# Altium PCB OpenBCI Hyperscanning.PcbDoc
Units mil, origin at the board's own origin, x right, y up, seen from the top; angles counter-clockwise.
Board outline 1645 x 1125 mil, 2 copper layers (Top Layer, Bottom Layer); 35 components, 37 nets, 123 pads, 367 vias.
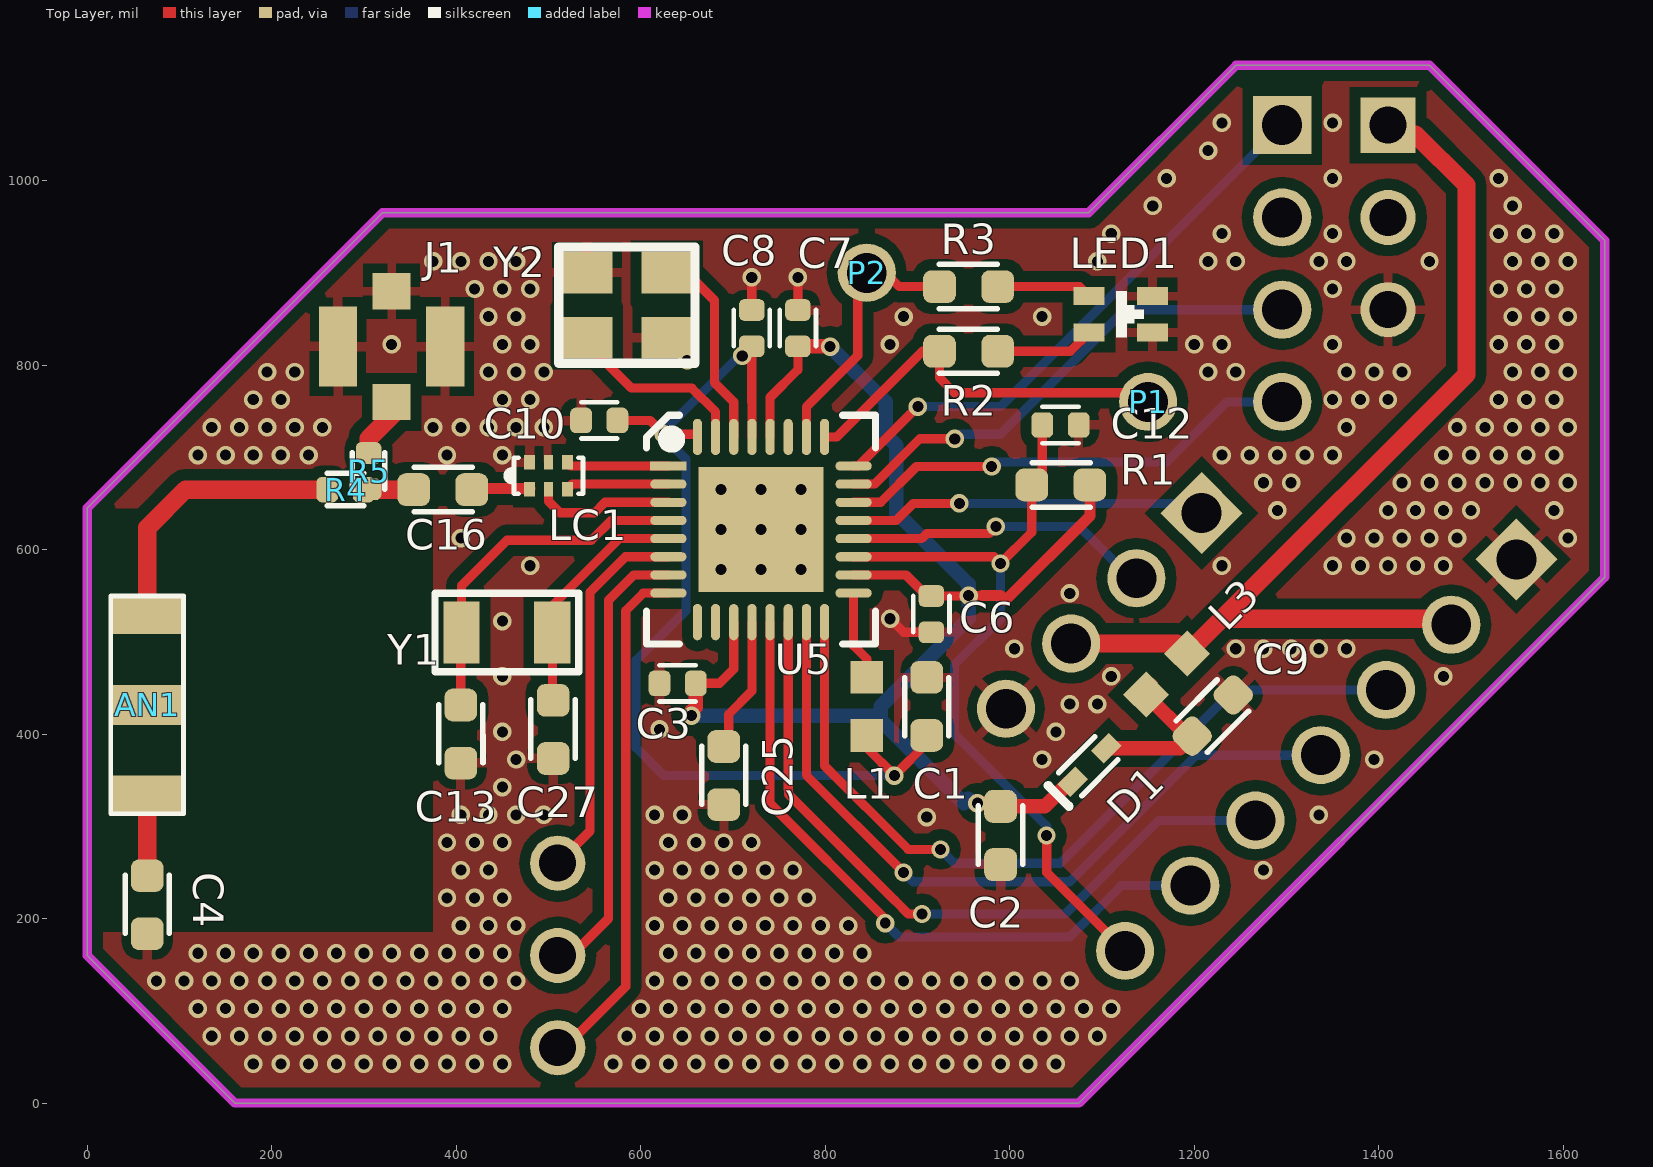
[diagram p0: Top Layer view]
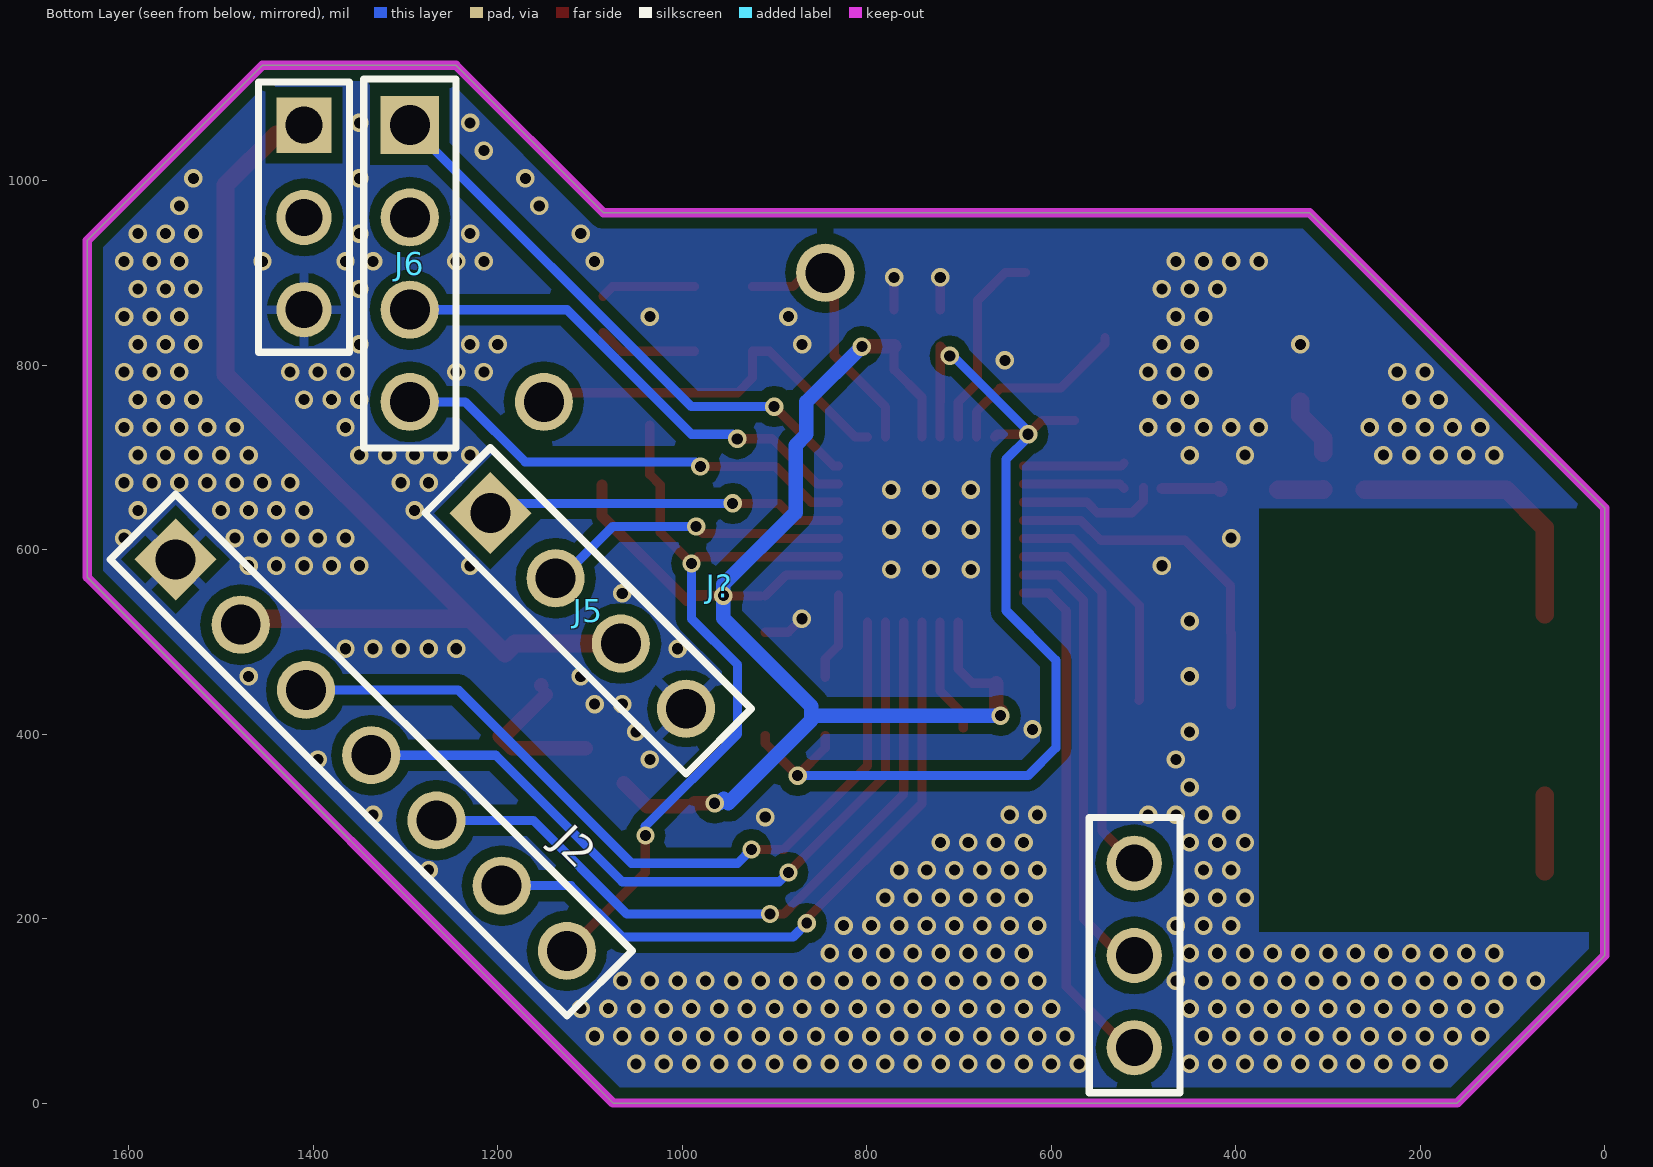
[diagram p1: Bottom Layer view, seen from below]
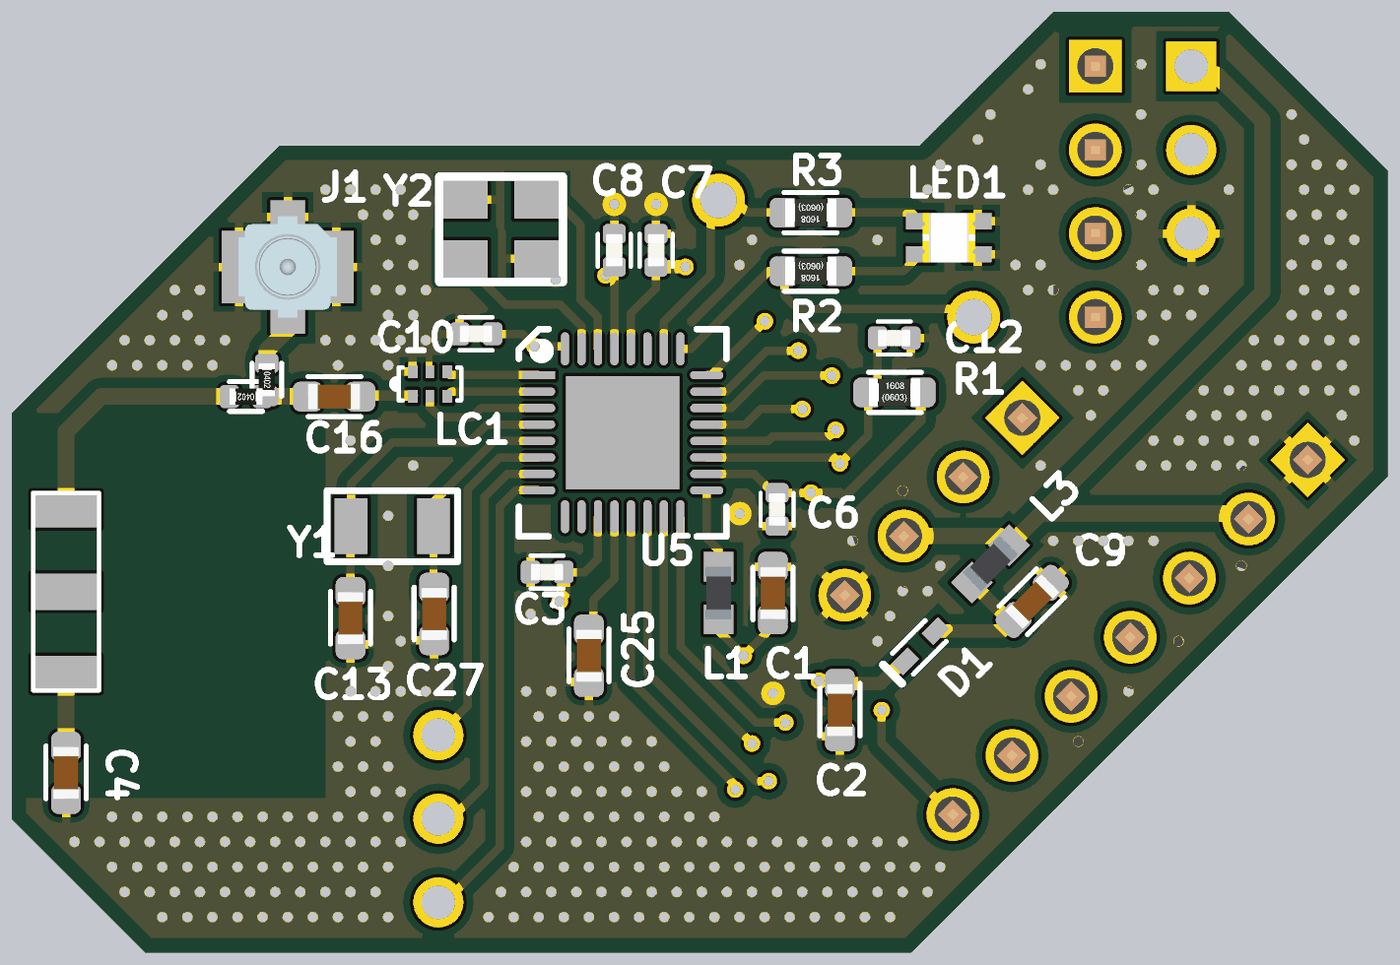
[diagram p2: 3D render of the assembled board from above, using the file's embedded part models]
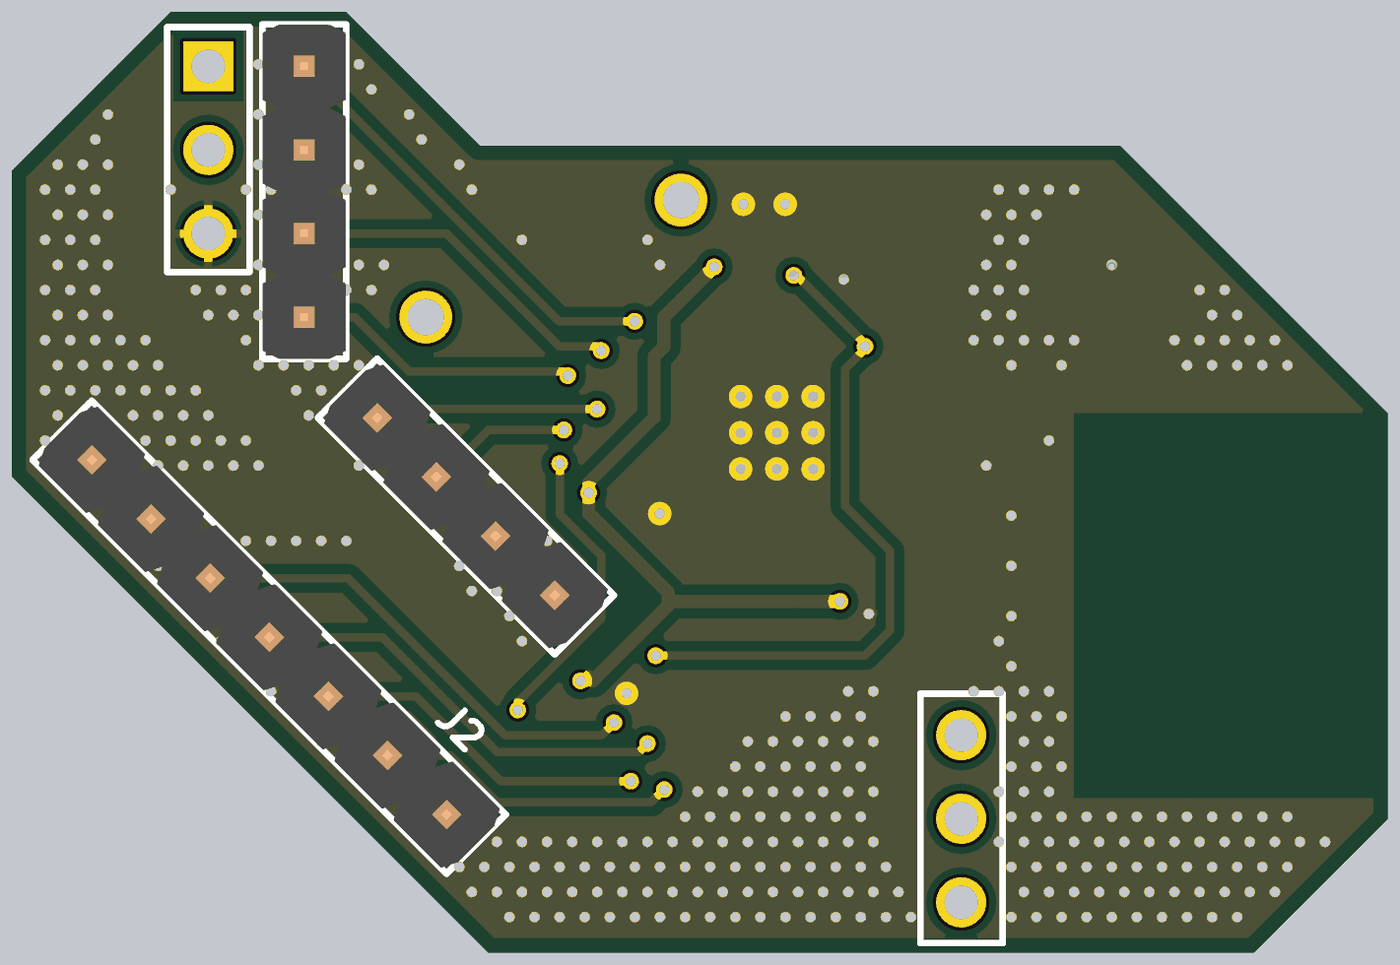
[diagram p3: 3D render of the assembled board from below, using the file's embedded part models]

## Layer stack, top to bottom
Top Solder: solder mask 0.4, Solder Resist, Dk 3.5
Top Layer: signal copper 1.4
Dielectric 1: dielectric 12.6, FR-4, Dk 4.8
Bottom Layer: signal copper 1.4
Bottom Solder: solder mask 0.4, Solder Resist, Dk 3.5

## Board outline
0,160 0,645 320,965 1085.35,965 1245.35,1125 1455,1125 1645,935 1645,570 1075.01,0 160,0

## Design rules (kind name [scope] priority, off if disabled: settings)
Clearance "Stitching GND" [IsStitchingVia and InNet('GND') vs (IsVia and (Not IsStitchingVia)) Or IsPad] p1: gap=5 ignorepadtopadclearanceinfootprint=FALSE
Clearance [All] p2: gap=12 ignorepadtopadclearanceinfootprint=FALSE except(5: Arc-Text Track-Text SMDPad-Text THPad-Text Via-Text Fill-Text Poly-Text Region-Text Text-Text; 7.87: Arc-Arc Arc-Track Track-Track; 8: Arc-SMDPad Track-SMDPad SMDPad-SMDPad SMDPad-THPad SMDPad-Via SMDPad-Hole; 10: Arc-THPad Arc-Via Arc-Hole Track-THPad Track-Via Track-Hole THPad-THPad THPad-Via THPad-Hole Via-Via Via-Hole Fill-Hole Poly-Hole Region-Hole Text-Hole)
ComponentClearance [All] p1: gap=0 collisioncheckmode=3 verticalgap=0 showdistances=FALSE
HoleSize [All] p1: absolutevalues=TRUE maxlimit=100 minlimit=11.81 maxpercent=80.000 minpercent=20.000
MinimumSolderMaskSliver [All] p1: minsoldermaskwidth=8
PolygonConnect [All] p1: thpad.connectstyle=Relief thpad.reliefconductorwidth=10 thpad.reliefentries=4 thpad.polygonreliefangle="90 Angle" thpad.airgapwidth=10 smdpad.connectstyle=Relief smdpad.reliefconductorwidth=10 smdpad.reliefentries=4 smdpad.polygonreliefangle="90 Angle" smdpad.airgapwidth=10 via.connectstyle=Direct via.reliefconductorwidth=10 via.reliefentries=4 via.polygonreliefangle="90 Angle" via.airgapwidth=10
RoutingVias [All] p1: holewidth=11.81 width=19.68 viastyle="Through Hole" minholewidth=11.81 minwidth=19.68 maxholewidth=28 maxwidth=50
SilkToSolderMaskClearance [IsPad] p1: minsilkscreentomaskgap=6 clearancetoexposedcopper=TRUE
SolderMaskExpansion [All] p1: expansion=4 istentingtop=FALSE
Width [All] p1: maxlimit=30 minlimit=8 preferedwidth=12 minimp=50.000000 maximp=50.000000 favimp=50.000000
26 further rules are at their usual default settings.

## Components (designator, comment, footprint, x,y, rotation, side; value= is the part's Value field where it differs from the comment)
AN1 "Antenna Chip" Antena_ethertronics_M620720 65,431.57 r270 top value=Sub-1GHz
C1 "22uF" "C0603 - rounded" 910,430 r90 top
C2 "10uF" "C0603 - rounded" 990,290 r270 top
C3 "100nF" "C0402 - rounded" 640,455 r180 top
C4 "NP" "C0603 - rounded" 65,215 r270 top
C6 "100nF" "C0402 - rounded" 915,530 r270 top
C7 "100nF" "C0402 - rounded" 770.35,840 r90 top
C8 "100nF" "C0402 - rounded" 720.35,840 r90 top
C9 "10uF" "C0603 - rounded" 1220,420 r45 top
C10 "100nF" "C0402 - rounded" 555,740 r180 top
C12 "100nF" "C0402 - rounded" 1055,735 r0 top
C13 "12pF" "C0603 - rounded" 405,400 r270 top
C16 "100pF" "C0603 - rounded" 385.35,665 r180 top
C25 "1uF" "C0603 - rounded" 690,355 r270 top
C27 "12pF" "C0603 - rounded" 505,405 r270 top
D1 "Schottky Diode" SOD523 1085,365 r45 top
J1 "U.FL PCB SMT" "U.FL MALE SMT" 330,820.04 r0 top value=NP
J2 "07p" 61300711121 1337.13,377.13 r225 bottom
J5 "04p" 61300411121 1101.96,533.51 r225 bottom
J6 "04p" 61300411121 1295.35,910 r270 bottom
J? "Sub1Ghz-ESP-Conn" SUB1GHZ-ESP-CONN 1410,1060 r270 bottom
L1 "Inductor 0603" L0603 845,430 r270 top value=680uH
L3 "Ferrite bead 0603" L0603 1170,465 r225 top value="Bead 600Ohms"
LC1 "Balun" Balun_0603 500,680 r0 top value=Diversos
LED1 "APTB1615SURKCGKC" APTB1615SURKCGKC 1120.35,855 r270 top
P1 "Single Pin Conn" SinglePin 1150,760 r0 top
P2 "Single Pin Conn" SinglePin 845,900 r0 top
R1 "100K" "R0603 - rounded" 1055.35,670 r0 top value=100k
R2 "200R" "R0603 - rounded" 955.35,815 r180 top
R3 "200R" "R0603 - rounded" 955.35,885 r180 top
R4 "NP" "R0402 - rounded" 280,665 r180 top
R5 "NP" "R0402 - rounded" 305,685 r270 top
U5 "CC1310F128RHB" VQFN32-5x5 730.35,621.69 r0 top
Y1 "XTAL_FC135" "XTAL FC-135" 455,510 r270 top value=32.768kHz
Y2 "XTAL_TSX3225" "XTAL TSX-3225" 585,865 r90 top value=24MHz

## Footprints (in the part's own frame and the unit in brackets; to place one, negate y for a bottom-side part, rotate by r counter-clockwise, add the part's x,y. Pads: shape width x height; smd on the part's side, far side on the other; paste and mask are expansions set on the pad)
61300411121 [mm] "4 pins, 1 row, straight, gold plating"
  rect 1.6x1.6 hole 1.1: 1(-3.81,0)
  round 1.6 hole 1.1: 2(-1.27,0) 3(1.27,0) 4(3.81,0)
  silkscreen extent -5.08,-1.27 5.08,1.27, body extent -5.08,-1.27 5.08,1.27, height 8.57
61300711121 [mm] "7 pins, 1 row, straight, gold plating"
  rect 1.6x1.6 hole 1.1: 1(-7.62,0)
  round 1.6 hole 1.1: 2(-5.08,0) 3(-2.54,0) 4(0,0) 5(2.54,0) 6(5.08,0) 7(7.62,0)
  silkscreen extent -8.89,-1.27 8.89,1.27, body extent -8.89,-1.27 8.89,1.27, height 8.57
Antena_ethertronics_M620720 [mm] "Antena chip Ethertronics Sub-1GHz"
  rect 1.1x2.1 smd: 1(-2.5,0) 2(0,0) 3(2.5,0)
  silkscreen extent -3,-1 3,1, body extent -2.99,-1 3,1, height 1.08
APTB1615SURKCGKC [mm]
  rect 0.5x0.85 smd: A1(-0.5,-0.875) A2(0.5,-0.875) C1(-0.5,0.875) C2(0.5,0.875)
  silkscreen extent -0.64,-0.13 0.63,0.64, body extent -0.75,-0.8 0.75,0.8, height 0.58
Balun_0603 [mm] "SMD Balun 0603"
  rect 0.3x0.4 smd: 1(-0.525,-0.375) 3(0.525,-0.375) 4(0.525,0.375) 6(-0.525,0.375)
  rect 0.25x0.4 smd: 2(0,-0.375) 5(0,0.375)
  silkscreen extent -1.18,-0.5 0.95,0.5, body extent -0.8,-0.4 0.8,0.4, height 0.6
"C0402 - rounded" [mm]
  rrect50% 0.6x0.7 smd: 1(-0.5,0) 2(0.5,0)
  silkscreen extent -0.5,-0.5 0.5,0.5, body extent -0.5,-0.26 0.5,0.27, height 0.36
"C0603 - rounded" [mm] "Chip Capacitor, Body 3.2x1.6mm, IPC High Density"
  rrect50% 0.9x0.9 smd: 1(-0.8,0) 2(0.8,0)
  Top Layer pour cut-out: -0.3,0.457 -0.3,-0.419 0.3,-0.419 0.3,0.457
  silkscreen extent -0.81,-0.61 0.79,0.61, body extent -0.8,-0.4 0.8,0.4, height 0.8
L0603 [mm]
  rect 0.9x0.9 smd: 1(-0.8,0) 2(0.8,0)
  Top Layer pour cut-out: -0.3,0.5 0.3,0.5 0.3,-0.5 -0.3,-0.5
  body extent -0.8,-0.4 0.8,0.4, height 0.8
"R0402 - rounded" [mm]
  rrect50% 0.6x0.7 smd: 1(-0.5,0) 2(0.5,0)
  silkscreen extent -0.5,-0.45 0.5,0.45, body extent -0.5,-0.25 0.5,0.25, height 0.35
"R0603 - rounded" [mm]
  rrect50% 0.9x0.9 smd: 1(-0.8,0) 2(0.8,0)
  Top Layer pour cut-out: -0.3,0.5 0.3,0.5 0.3,-0.5 -0.3,-0.5
  silkscreen extent -0.79,-0.61 0.81,0.61, body extent -0.77,-0.42 0.78,0.43, height 0.45
SinglePin [mm]
  round 1.6 hole 1.1: 1(0,0)
SOD523 [mil]
  rect 27.56x19.69 smd: A(27.56,0) C(-23.62,0)
  silkscreen extent -45,-18 28,18
SUB1GHZ-ESP-CONN [mm]
  rect 1.52x1.52 hole 1.02: 1(0,0)
  round 1.52 hole 1.02: 2(2.54,0) 3(5.08,0) 4(20.32,22.86) 5(22.86,22.86) 6(25.4,22.86)
  silkscreen extent -1.19,-1.25 26.64,24.12
"U.FL MALE SMT" [mm]
  rect 1.05x1 smd: 1(0,-1.525) 2(0,1.525)
  rect 1.05x2.2 smd: 2(-1.475,0) 2(1.475,0)
  body extent -1.5,-1.54 1.5,1.54, height 1.23
VQFN32-5x5 [mm] "QFN, 32-Leads, Body 5x5mm, Pitch 0.5mm, Thermal Pad 3.45x3.45mm, IPC Medium Density"
  rect 1x0.25 smd: 1(-2.55,1.75)
  oval 1x0.25 smd: 2(-2.55,1.25) 3(-2.55,0.75) 4(-2.55,0.25) 5(-2.55,-0.25) 6(-2.55,-0.75) 7(-2.55,-1.25) 8(-2.55,-1.75) 17(2.55,-1.75) 18(2.55,-1.25) 19(2.55,-0.75) 20(2.55,-0.25) 21(2.55,0.25) 22(2.55,0.75) 23(2.55,1.25) 24(2.55,1.75)
  oval 0.25x1 smd: 9(-1.75,-2.55) 10(-1.25,-2.55) 11(-0.75,-2.55) 12(-0.25,-2.55) 13(0.25,-2.55) 14(0.75,-2.55) 15(1.25,-2.55) 16(1.75,-2.55) 25(1.75,2.55) 26(1.25,2.55) 27(0.75,2.55) 28(0.25,2.55) 29(-0.25,2.55) 30(-0.75,2.55) 31(-1.25,2.55) 32(-1.75,2.55)
  rect 3.45x3.45 smd: 33(0,0)
  silkscreen extent -3.15,-3.15 3.15,3.15, body extent -2.79,-2.79 2.79,2.79, height 1
"XTAL FC-135" [mm]
  rect 1.7x1 smd: 1(0,-1.25) 2(0,1.25)
  silkscreen extent -1.08,-1.98 1.08,1.98
"XTAL TSX-3225" [mm]
  rect 1.15x1.4 smd: 1(-0.9,1.1) 2(0.9,-1.1) 3(-0.9,-1.1) 3(0.9,1.1)
  silkscreen extent -1.6,-1.87 1.6,1.88

## Part data
AN1: library part Antena_chip_Sub-1GHz_Kyocera, "Antennas Ceramic Chip ANTENNA ISM Freq: 868 915MHz", Part Number=M620720, Família=Antena, Vendor=AVX
C1 C2 C3 C4 C6 C7 C8 C9 C10 C12 C13 C16 C25 C27: library part C-EU-SMD, "Generic Capacitor SMD"
D1: library part SCHOTTKY-DIODEDO201T15, Part Number=PMEG2010AEB,115, Familia=Diodos, Vendor=Nexperia
J1: "RF Connectors / Coaxial Connectors MHF1 Connector Receptacle, Male Pin 50 Ohm Surface Mount Solder", Família=Antena, Vendor="TE Connectivity"
J2: library part 61300711121, "WR-PHD 2.54 mm THT Pin Header, 07p", Part Number=61300711121, Vendor="Wurth Elektronik"
J5 J6: library part 61300411121, "WR-PHD 2.54 mm THT Pin Header, 04p", Part Number=61300411121, Vendor="Wurth Elektronik"
L1: library part L-US0603
L3: library part L-US0603, "Ferrite Beads 0603 600ohms", Part Number=MPZ1608S601ATA00, Familia=Indutores, Vendor=Murata
LC1: library part Balun_CC1310, "Sub-GHz Impedance Matched Balun + LPF integrated Passive Component for Texas Instruments CC1310 Chipset", Part Number="0850BM14E0016 or LFB18868MBG9E212", Familia=Diversos, Vendor="Johanson / Murata"
R1 R4 R5: library part R-US-SMD, "Generic Resistor SMD"
R2 R3: library part R-US_R0603, "Resistor SMD 0603"
U5: library part CC1310F32RHB, "Sub-1 GHz and 2.4 GHz Multi-standard RF IC Family, RSM", Familia=CI's, Part Number=CC1310F128RHB, Vendor="TEXAS INSTRUMENTS"
Y1: "CRYSTAL, RESONATOR, 32.768kHz, -20PPM/+20PPM, -40DEGC/+85DEGC, SMD", Part Number="FC-135 32.7680KA-AG0", Familia=Diversos, Vendor=Epson
Y2: "CRYSTAL, CRYSTAL OSCILLATOR, 24MHz, -15PPM/DEGC/+15PPM/DEGC, -40DEGC/+85DEGC, SMD", Part Number="TSX-3225 24.0000MF15X-AC3", Familia=Diversos, Vendor=Epson
LED1: Familia=LED_OPTO, Part Number=APTB1615SURKCGKC, Vendor=Kingbright

## Via types
v1: diameter 20, hole 12, Top Layer to Bottom Layer, tented both sides, 336 vias
v2: diameter 20, hole 12, Top Layer to Bottom Layer, 25 vias
v3: diameter 19.68, hole 11.81, Top Layer to Bottom Layer, 6 vias

## Nets (pads, with @x,y where several pads share a name; then routed paths per layer and width w, separated by ;. In a path a pad name is that pad's centre, name@x,y a point inside that pad or via, vN(x,y) a via of type N, cw(c..) or ccw(c..) an arc to the next point about the centre after c; other vN are vias at no path point)
3V3: J2.2 J5.3 J?.1 L3.1 | length 1127.9
  Top Layer w19.68: J5.3 1181.39,498.15 L3.1 1230,525 ; J?.1@1410,1050 1440,1050 1495,995 1495,790 1230,525 ; J2.2 1472.11,525 1230,525
  Bottom Layer w19.68: J5.3 J5.3@1072.2,498.15
A2: J?.6 U5.8 | length 562.7
  Top Layer w10: J?.6 517.32,60 583.66,126.34 583.66,533.66 602.8,552.8 U5.8
A3: J?.5 U5.7 | length 492.9
  Top Layer w10: J?.5 525,160 565,200 565,545 592.48,572.48 U5.7
A4: J?.4 U5.6 | length 409
  Top Layer w10: J?.4 545,295 545,553.61 583.56,592.17 U5.6
CY_D11: J6.4 U5.22 | length 509.7
  Top Layer w10: U5.22 860.18,651.22 898.96,690 v2(980.35,690)
  Bottom Layer w10: v2(980.35,690) 985.35,695 1170.35,695 1235.35,760 J6.4
CY_D12: J5.2 U5.20 | length 335.3
  Top Layer w10: U5.20 904.42,611.85 910,617.43 977.43,617.43 v2(985,625)
  Bottom Layer w10: v2(985,625) 1075.35,625 1131.49,568.86 J5.2
CY_D13: J5.1 U5.21 | length 389.2
  Top Layer w10: U5.21 876.89,631.54 895.35,650 v2(945.35,650)
  Bottom Layer w10: v2(945.35,650) 1197.6,650 J5.1
CY_D17: J6.1 U5.24 | length 617.6
  Top Layer w10: U5.24 835.94,690.59 v2(900.35,755)
  Bottom Layer w10: v2(900.35,755) 990.35,755 J6.1
CY_D18: J6.3 U5.23 | length 542.9
  Top Layer w10: U5.23 853.48,670.91 902.57,720 v2(940.35,720)
  Bottom Layer w10: v2(940.35,720) 945.35,725 990,725 1125,860 J6.3
CY_RST: J6.2
DCDC_SW: L1.1 U5.17 | length 95.2
  Top Layer w10: U5.17@830.75,550.82 830.75,495.75 845,481.5 L1.1
GND: C1.2 C2.2 C3.2 C4.2 C6.2 C7.2 C8.2 C9.2 C10.2 C12.2 C13.2 C25.2 C27.2 J1.2 J2.1 J5.4 J?.3 LC1.5 LC1.6 LED1.C1 LED1.C2 U5.33 Y2.3 | length 116.7
  Top Layer w10: C8.2 v2@720.35,894.99 ; C7.2 v2(770.35,894.99) ; v2(870.35,525) 885.05,510.31 C6.2@910.36,510.31
  other v1: 180,42.43 210,42.43 240,42.43 270,42.43 300,42.43 330,42.43 360,42.43 390,42.43 420,42.43 450,42.43 570,42.43 600,42.43 630,42.43 660,42.43 690,42.43 720,42.43 750,42.43 780,42.43 810,42.43 840,42.43 870,42.43 900,42.43 930,42.43 960,42.43 990,42.43 1020,42.43 1050,42.43 135,72.43 165,72.43 195,72.43 225,72.43 255,72.43 285,72.43 315,72.43 345,72.43 375,72.43 405,72.43 435,72.43 585,72.43 615,72.43 645,72.43 675,72.43 705,72.43 735,72.43 765,72.43 795,72.43 825,72.43 855,72.43 885,72.43 915,72.43 945,72.43 975,72.43 1005,72.43 1035,72.43 1065,72.43 1095,72.43 120,102.43 150,102.43 180,102.43 210,102.43 240,102.43 270,102.43 300,102.43 330,102.43 360,102.43 390,102.43 420,102.43 450,102.43 600,102.43 630,102.43 660,102.43 690,102.43 720,102.43 750,102.43 780,102.43 810,102.43 840,102.43 870,102.43 900,102.43 930,102.43 960,102.43 990,102.43 1020,102.43 1050,102.43 1080,102.43 1110,102.43 75,132.43 105,132.43 135,132.43 165,132.43 195,132.43 225,132.43 255,132.43 285,132.43 315,132.43 345,132.43 375,132.43 405,132.43 435,132.43 465,132.43 615,132.43 645,132.43 675,132.43 705,132.43 735,132.43 765,132.43 795,132.43 825,132.43 855,132.43 885,132.43 915,132.43 945,132.43 975,132.43 1005,132.43 1035,132.43 1065,132.43 120,162.43 150,162.43 180,162.43 210,162.43 240,162.43 270,162.43 300,162.43 330,162.43 360,162.43 390,162.43 420,162.43 450,162.43 630,162.43 660,162.43 690,162.43 720,162.43 750,162.43 780,162.43 810,162.43 840,162.43 405,192.43 435,192.43 465,192.43 615,192.43 645,192.43 675,192.43 705,192.43 735,192.43 765,192.43 795,192.43 825,192.43 390,222.43 420,222.43 450,222.43 630,222.43 660,222.43 690,222.43 720,222.43 750,222.43 780,222.43 405,252.43 435,252.43 615,252.43 645,252.43 675,252.43 705,252.43 735,252.43 765,252.43 1275,252.43 390,282.43 420,282.43 450,282.43 630,282.43 660,282.43 690,282.43 720,282.43 405,312.43 435,312.43 465,312.43 495,312.43 615,312.43 645,312.43 1335,312.43 450,342.43 465,372.43 1035,372.43 1395,372.43 450,402.43 1050,402.43 620.35,405 1065,432.43 1095,432.43 450,462.43 1110,462.43 1470,462.43 1005,492.43 1245,492.43 1275,492.43 1305,492.43 1335,492.43 1365,492.43 450,522.43 1065,552.43 480,582.43 1230,582.43 1350,582.43 1380,582.43 1410,582.43 1440,582.43 1470,582.43 405,612.43 1365,612.43 1395,612.43 1425,612.43 1455,612.43 1485,612.43 1605,612.43 1290,642.43 1410,642.43 1440,642.43 1470,642.43 1500,642.43 1590,642.43 1275,672.43 1305,672.43 1425,672.43 1455,672.43 1485,672.43 1515,672.43 1545,672.43 1575,672.43 1605,672.43 120,702.43 150,702.43 180,702.43 210,702.43 240,702.43 390,702.43 450,702.43 1230,702.43 1260,702.43 1290,702.43 1320,702.43 1350,702.43 1470,702.43 1500,702.43 1530,702.43 1560,702.43 1590,702.43 135,732.43 165,732.43 195,732.43 225,732.43 255,732.43 375,732.43 405,732.43 435,732.43 465,732.43 495,732.43 1365,732.43 1485,732.43 1515,732.43 1545,732.43 1575,732.43 1605,732.43 180,762.43 210,762.43 450,762.43 480,762.43 1350,762.43 1380,762.43 1410,762.43 1530,762.43 1560,762.43 1590,762.43 195,792.43 225,792.43 435,792.43 465,792.43 495,792.43 1215,792.43 1245,792.43 1365,792.43 1395,792.43 1425,792.43 1545,792.43 1575,792.43 1605,792.43 650.35,805 330,822.43 450,822.43 480,822.43 870,822.43 1200,822.43 1230,822.43 1350,822.43 1530,822.43 1560,822.43 1590,822.43 435,852.43 465,852.43 885,852.43 1035,852.43 1545,852.43 1575,852.43 1605,852.43 420,882.43 450,882.43 480,882.43 1350,882.43 1530,882.43 1560,882.43 1590,882.43 375,912.43 405,912.43 435,912.43 465,912.43 1095,912.43 1215,912.43 1245,912.43 1335,912.43 1365,912.43 1455,912.43 1545,912.43 1575,912.43 1605,912.43 1110,942.43 1230,942.43 1350,942.43 1530,942.43 1560,942.43 1590,942.43 1155,972.43 1545,972.43 1170,1002.43 1350,1002.43 1530,1002.43 1215,1032.43 1230,1062.43 1350,1062.43
  other v2: 910,310 687.05,578.39 730.35,578.39 773.66,578.39 687.05,621.69 730.35,621.69 773.66,621.69 687.05,665 730.35,665 773.66,665 720.35,895
JTAG_RST: C12.1 J2.7 R1.1 U5.19 | length 848.3
  Top Layer w10: U5.19 982.83,592.17 v3(990,585) 1023.86,618.86 R1.1 1035.32,681.47 C12.1 ; v3(1040,290) 1040,250 J2.7
  Bottom Layer w10: v3(990,585) 990,525 940,475 940,400 1040,300 v3(1040,290)
JTAG_TCKC: J2.5 U5.14 | length 788.5
  Top Layer w10: 759.88,340.12 U5.14 ; 760.2,340.12 760.2,334.8 875.16,219.84 875.29,219.84 890.13,205 v3(905,205)
  Bottom Layer w10: v3(905,205) 1060,205 1161.42,306.42 J2.5
JTAG_TDI: J2.3 U5.16 | length 885.8
  Top Layer w10: U5.16 799.25,365.75 890,275 v3(925,275)
  Bottom Layer w10: v3(925,275) 940,260 1055,260 1242.84,447.84 J2.3
JTAG_TDO: J2.4 U5.15 | length 828
  Top Layer w10: U5.15 779.57,355.43 v3(885,250)
  Bottom Layer w10: v3(885,250) 895,240 1065,240 1202.13,377.13 J2.4
JTAG_TMSC: J2.6 U5.13 | length 734.8
  Top Layer w10: U5.13 740.2,324.8 v3@866.28,198.72
  Bottom Layer w10: v3(865,195) 880,180 1065,180 1120.71,235.71 J2.6
LED1: P1.1 R2.2 U5.25 | length 428.9
  Top Layer w10: U5.25 812.44,722.09 905.35,815 R2.2 923.86,786.14 940,770 1140,770 P1.1
LED2: P2.1 R3.2 U5.26 | length 290.1
  Top Layer w10: U5.26 779.57,754.57 835.35,810.35 835.35,890.35 P2.1 865.35,900 880.35,885 R3.2
NetAN1_1: AN1.1 R4.2 | length 306
  Top Layer w20: AN1.1 65,623.43 106.57,664.99 R4.2
NetAN1_3: AN1.3 C4.1 | length 81.7
  Top Layer w20: C4.1@65,251.5 AN1.3
NetC9_1: C9.1 D1.A L3.2 | length 167.4
  Top Layer w15.75: D1.A 1184.48,384.49 C9.1 1192.73,397.73 L3.2
NetC13_1: C13.1 U5.4 Y1.1 | length 383.1
  Top Layer w10: C13.1 405,509.22 Y1.1 405.79,560.79 455,610 546.39,610 567.93,631.54 U5.4
NetC16_1: C16.1 LC1.1 | length 63.3
  Top Layer w12: C16.1@418.08,666.22 LC1.1@479.68,666.22
  Top Layer w16: C16.1 C16.1@418.08,666.22
NetC16_2: C16.2 R4.1 R5.2 | length 49
  Top Layer w20: R5.2 305.32,665 C16.2
NetC25_1: C25.1 U5.12 | length 125.2
  Top Layer w10: 695.36,406.5 695.36,421.5 720.51,446.65 U5.12
NetC27_1: C27.1 U5.5 Y1.2 | length 258.9
  Top Layer w10: C27.1 504.21,437.29 Y1.2 504.21,539.21 576.85,611.85 U5.5
NetJ1_1: J1.1 R5.1 | length 65.7
  Top Layer w20: R5.1 305.01,720.01 330,745 J1.1
NetLC1_2: LC1.2 U5.3 | length 154.5
  Top Layer w10: LC1.2@500,667.22 LC1.2 500,652.43 512.43,640 550,640 561.22,651.22 U5.3
NetLC1_3: LC1.3 U5.2 | length 110.9
  Top Layer w10: LC1.3@521.02,666.22 525.71,670.91 U5.2
NetLC1_4: LC1.4 U5.1 | length 110.3
  Top Layer w10: LC1.4@521.02,693.78 524.21,690.59 U5.1
NetLED1_A1: LED1.A1 R3.1 | length 103.3
  Top Layer w10: R3.1 1075.59,885 LED1.A1
NetLED1_A2: LED1.A2 R2.1 | length 107.5
  Top Layer w10: R2.1 1065.59,815 LED1.A2
NetU5_30: U5.30 Y2.2 | length 220.8
  Top Layer w10: Y2.2 649.57,900.43 680,870 680,780.83 700.83,760 U5.30
NetU5_31: U5.31 Y2.1 | length 203.5
  Top Layer w10: Y2.1 541.69,823.31 590,775 655.35,775 681.14,749.21 U5.31
VDDR: C1.1 C8.1 C10.1 L1.2 U5.29 U5.32 | length 1097.9
  Top Layer w10: C10.1 610.01,739.99 v2(625,725) 658.54,725 U5.32 ; v2(710,809.97) C8.1 720.35,760.01 720.51,759.84 U5.29 ; L1.2 845,385 v2(875,355) 910,390 C1.1
  Bottom Layer w10: v2(710,809.97) 706.77,809.97 625,728.2 v2(625,725) 625,721.79 649.02,697.77 649.02,534.02 595,480 595,385 625,355 v2@865,355
VDDS: C2.1 C3.1 C6.1 C7.1 D1.C R1.2 U5.11 U5.18 U5.28 | length 1599.5
  Top Layer w10: C3.1 685.35,454.99 700.83,470.47 U5.11 ; U5.28 740.2,764.84 770.35,794.99 C7.1 ; U5.18 887.56,572.48 C6.1@910.36,549.68 ; C6.1 970.03,549.68 969.71,550 v2(955.35,550)
  Top Layer w11.81: 969.71,550 989.78,550 995.07,544.71 1086.85,636.49 R1.2
  Top Layer w15.75: v2(655,420) 655,424.65 659.68,429.33 C3.1 ; C7.1 805.03,820.32 v2(805.35,820) ; v2(965,325) 986.5,325 C2.1 1038.09,321.5 D1.C@1063.3,346.7
  Bottom Layer w15.75: v2(655,420) 860.18,420 ; v2(805.35,820) 865.35,760 865.35,724.91 877.01,713.26 877.01,640 877.47,640 955.35,562.12 v2(955.35,550) 955.35,525.35 860.18,430.18 860.18,420 ; v2(965,325) 960,325 955,330 950,325 860.18,414.82 860.18,420
pads on no net: AN1.2 J?.2 U5.9 U5.10 U5.27

## Polygon pours and split planes (outlines as drawn)
GND on Top Layer "Top Layer-No Net" (solid, pour order 12): 160,0 1075.01,0 1075.01,0.01 1645,570 1645,935 1455,1125 1245.35,1125 1085.35,965 320,965 0,645 0,160
GND on Bottom Layer "Top Layer-No Net" (solid, pour order 14): 160,0 1075.01,0 1075.01,0.01 1645,570 1645,935 1455,1125 1245.35,1125 1085.35,965 320,965 0,645 0,160

## Keep-outs
Keep-Out Layer:
  lines w10: 0,160 0,455 0,630 0,645 320,965 1085.35,965 1245.35,1125 1455,1125 1645,935 1645,570 1075.01,0 160,0 0,160

## Other copper
Top Layer:
  pour cut-out: 0,645 375,645 375,185 0,185
Bottom Layer:
  pour cut-out: 0,645 375,645 375,185 0,185